# EAGLE board led (EAGLE 8.5.1)
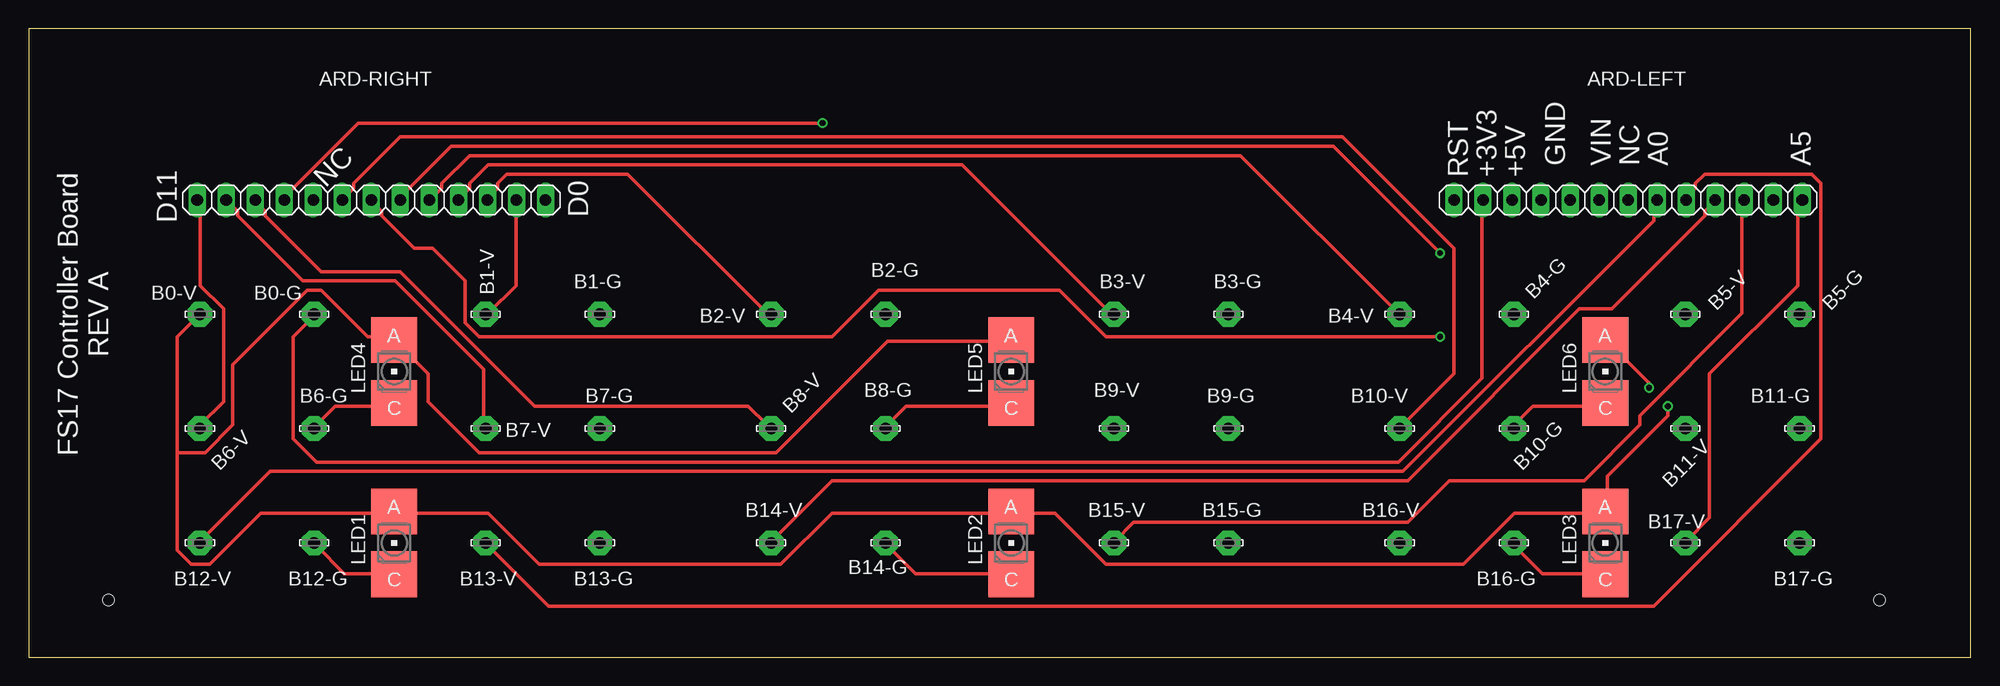
[diagram p0: board, top side]
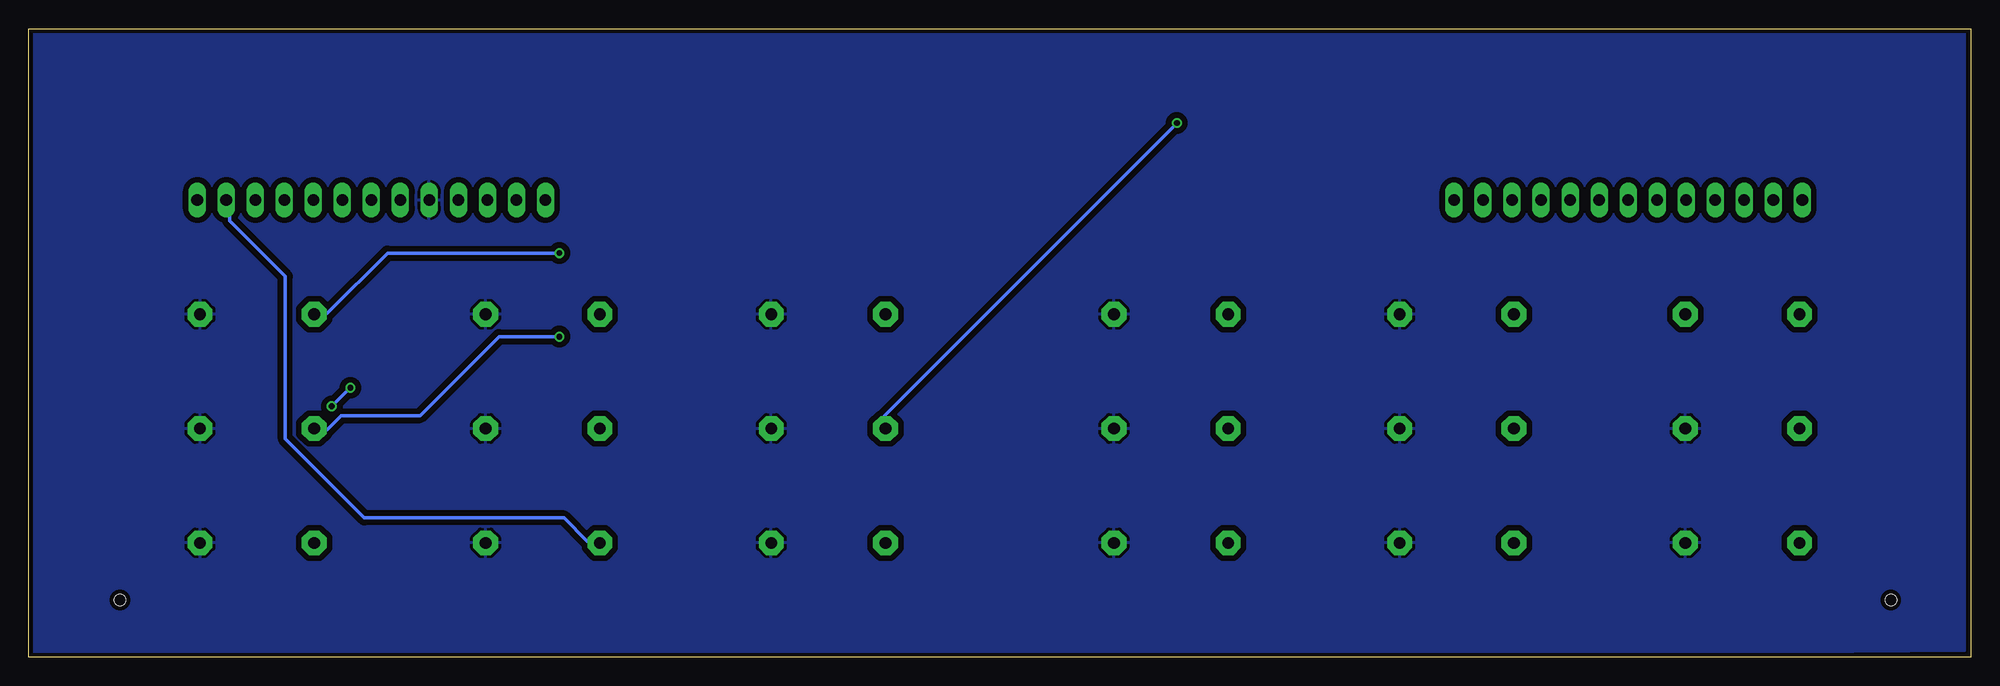
[diagram p1: board, bottom side, seen from below]

Size 170 x 55 mm. Coordinates in mm from the lower left corner, seen from the top.
Outline: 0,0 170,0 170,55 0,55 0,0
Copper layers (1*16): Top 0.0356mm / dielectric 1.5011mm / Bottom 0.0356mm
Design rules "oshpark-2layer *": minimum track width 6mil, minimum drill 0.4mm, track to track 6mil, track to pad 6mil, pad to pad 6mil, via to via 6mil, smd to smd 6mil, copper to edge 15mil, drill to drill 6mil, minimum pad ring 7mil, minimum via ring 7mil, stop-mask expansion 2.5mil, vias tented up to drill 0mil, thermal gap 10mil
Net classes: 0 default: width 0.305 mm, drill 0.508 mm, clearance 0.508 mm
Holes 1 mm at 7,5 162,5

## Footprints (pad centres in the part's own frame; a part is rotated, then mirrored left to right if it is on the bottom)
1X13 = drill 1.016 long: 1 -15.24,0; 2 -12.7,0; 3 -10.16,0; 4 -7.62,0; 5 -5.08,0; 6 -2.54,0; 7 0,0; 8 2.54,0; 9 5.08,0; 10 7.62,0; 11 10.16,0; 12 12.7,0; 13 15.24,0
LSP10 = drill 1.016 pad 2.159 octagon: MP 0,0
P-LCC-2 = smd 4 x 4: A 0,2.75; C 0,-2.75

## Placement (x,y rotation side)
ARD-LEFT  [1X13]  140,40 0 top
ARD-RIGHT  [1X13]  30,40 0 top
B0-G  LSP10  [LSP10]  25,30 0 top
B0-V  LSP10  [LSP10]  15,30 0 top
B1-G  LSP10  [LSP10]  50,30 0 top
B1-V  LSP10  [LSP10]  40,30 0 top
B2-G  LSP10  [LSP10]  75,30 0 top
B2-V  LSP10  [LSP10]  65,30 0 top
B3-G  LSP10  [LSP10]  105,30 0 top
B3-V  LSP10  [LSP10]  95,30 0 top
B4-G  LSP10  [LSP10]  130,30 0 top
B4-V  LSP10  [LSP10]  120,30 0 top
B5-G  LSP10  [LSP10]  155,30 0 top
B5-V  LSP10  [LSP10]  145,30 0 top
B6-G  LSP10  [LSP10]  25,20 0 top
B6-V  LSP10  [LSP10]  15,20 0 top
B7-G  LSP10  [LSP10]  50,20 0 top
B7-V  LSP10  [LSP10]  40,20 0 top
B8-G  LSP10  [LSP10]  75,20 0 top
B8-V  LSP10  [LSP10]  65,20 0 top
B9-G  LSP10  [LSP10]  105,20 0 top
B9-V  LSP10  [LSP10]  95,20 0 top
B10-G  LSP10  [LSP10]  130,20 0 top
B10-V  LSP10  [LSP10]  120,20 0 top
B11-G  LSP10  [LSP10]  155,20 0 top
B11-V  LSP10  [LSP10]  145,20 0 top
B12-G  LSP10  [LSP10]  25,10 0 top
B12-V  LSP10  [LSP10]  15,10 0 top
B13-G  LSP10  [LSP10]  50,10 0 top
B13-V  LSP10  [LSP10]  40,10 0 top
B14-G  LSP10  [LSP10]  75,10 0 top
B14-V  LSP10  [LSP10]  65,10 0 top
B15-G  LSP10  [LSP10]  105,10 0 top
B15-V  LSP10  [LSP10]  95,10 0 top
B16-G  LSP10  [LSP10]  130,10 0 top
B16-V  LSP10  [LSP10]  120,10 0 top
B17-G  LSP10  [LSP10]  155,10 0 top
B17-V  LSP10  [LSP10]  145,10 0 top
LED1  3528W  [P-LCC-2]  32,10 0 top
LED2  3528W  [P-LCC-2]  86,10 0 top
LED3  3528W  [P-LCC-2]  138,10 0 top
LED4  3528W  [P-LCC-2]  32,25 0 top
LED5  3528W  [P-LCC-2]  86,25 0 top
LED6  3528W  [P-LCC-2]  138,25 0 top

## Library data of the parts
ARD-LEFT ARD-RIGHT = pinhead
B0-G B0-V B1-G B1-V B2-G B2-V B3-G B3-V B4-G B4-V B5-G B5-V B6-G B6-V B7-G B7-V B8-G B8-V B9-G B9-V B10-G B10-V B11-G B11-V B12-G B12-V B13-G B13-V B14-G B14-V B15-G B15-V B16-G B16-V B17-G B17-V = solpad; OC_FARNELL: unknown
LED1-LED6 = led

## Nets
+3V3: ARD-LEFT.2 B0-G.MP
+5V: ARD-LEFT.3
+9V: ARD-LEFT.6
A0: ARD-LEFT.8 B12-V.MP
A1: ARD-LEFT.9 B13-V.MP
A2: ARD-LEFT.10 B14-V.MP
A3: ARD-LEFT.11 B15-V.MP
A4: ARD-LEFT.12 B16-V.MP
A5: ARD-LEFT.13 B17-V.MP
BW0: B0-V.MP LED1.A LED2.A LED3.A LED4.A LED5.A LED6.A
D0: ARD-RIGHT.13
D1: ARD-RIGHT.12 B1-V.MP
D2: ARD-RIGHT.11 B2-V.MP
D3: ARD-RIGHT.10 B3-V.MP
D4: ARD-RIGHT.9 B4-V.MP
D5: ARD-RIGHT.8 B5-V.MP
D6: ARD-RIGHT.7 B11-V.MP
D7: ARD-RIGHT.6 B10-V.MP
D8: ARD-RIGHT.4 B9-V.MP
D9: ARD-RIGHT.3 B8-V.MP
D10: ARD-RIGHT.2 B7-V.MP
D11: ARD-RIGHT.1 B6-V.MP
GND: ARD-LEFT.5 B1-G.MP B2-G.MP B3-G.MP B4-G.MP B5-G.MP B6-G.MP B7-G.MP B8-G.MP B9-G.MP B10-G.MP B11-G.MP B12-G.MP B13-G.MP B14-G.MP B15-G.MP B16-G.MP B17-G.MP LED1.C LED2.C LED3.C LED4.C LED5.C LED6.C
GNDA: ARD-LEFT.4
NCA: ARD-LEFT.7
NCD: ARD-RIGHT.5
RST: ARD-LEFT.1

## Tracks (layer width: path | path; a pad name or v marks a point on that pad's centre or on a via)
+3V3
  Top 0.305: ARD-LEFT.2 127.2,39.83 127.2,24.38 119.89,17.07 25.2,17.07 23.16,19.1 23.16,28.04 24.79,29.67 B0-G.MP
A0
  Top 0.305: ARD-LEFT.8 142.24,39.83 142.24,38.2 120.29,16.26 21.13,16.26 15.04,10.16 B12-V.MP
A1
  Top 0.305: ARD-LEFT.9 145.09,40.23 145.9,41.05 145.9,41.45 146.71,42.27 156.06,42.27 156.87,41.45 156.87,19.1 142.24,4.47 45.52,4.47 40.23,9.75 B13-V.MP
A2
  Top 0.305: ARD-LEFT.10 147.52,39.83 146.71,39.01 146.71,38.61 138.58,30.48 135.74,30.48 120.7,15.44 70.31,15.44 65.02,10.16 B14-V.MP
A3
  Top 0.305: ARD-LEFT.11 149.96,39.83 149.96,30.07 141.02,21.13 141.02,20.32 136.14,15.44 124.36,15.44 120.7,11.79 96.72,11.79 95.1,10.16 B15-V.MP
A4
  Bottom 0.305: ARD-LEFT.12 152.4,39.83 152.4,38.2 147.52,33.33 147.52,19.1 140.61,12.19 123.14,12.19 121.11,10.16 120.29,10.16 B16-V.MP
A5
  Top 0.305: ARD-LEFT.13 154.84,39.83 154.84,32.51 147.12,24.79 147.12,12.19 145.09,10.16 B17-V.MP
BW0  (via drill 0.51)
  Top 0.305: v141.83,23.57 141.83,23.98 138.18,27.64 LED6.A | v143.46,21.95 143.46,21.13 138.18,15.85 138.18,13.01 LED3.A 137.77,12.6 130.05,12.6 125.58,8.13 94.28,8.13 89.81,12.6 86.16,12.6 LED2.A 85.75,12.6 70.31,12.6 65.84,8.13 44.7,8.13 40.23,12.6 32.11,12.6 LED1.A 31.7,12.6 20.32,12.6 15.85,8.13 14.22,8.13 13.01,9.35 13.01,17.88 | 13.01,17.88 13.01,28.04 14.63,29.67 B0-V.MP | 13.01,17.88 15.44,17.88 17.88,20.32 17.88,25.6 24.38,32.11 25.6,32.11 29.67,28.04 31.7,28.04 LED4.A 32.11,27.64 34.95,24.79 34.95,22.35 39.42,17.88 65.43,17.88 75.18,27.64 85.75,27.64 LED5.A
  Bottom 0.305: v143.46,21.95 v141.83,23.57
D1
  Top 0.305: ARD-RIGHT.12 42.67,39.83 42.67,32.51 40.23,30.07 B1-V.MP
D2
  Top 0.305: ARD-RIGHT.11 40.23,40.23 41.05,41.05 41.05,41.45 41.86,42.27 52.43,42.27 64.62,30.07 B2-V.MP
D3
  Top 0.305: ARD-RIGHT.10 37.8,40.23 38.61,41.05 38.61,41.45 40.23,43.08 81.69,43.08 94.69,30.07 B3-V.MP
D4
  Top 0.305: ARD-RIGHT.9 35.36,40.23 36.17,41.05 36.17,41.45 38.61,43.89 106.07,43.89 119.89,30.07 B4-V.MP
D5  (via drill 0.51)
  Top 0.305: v123.55,35.36 114.2,44.7 36.98,44.7 32.92,40.64 32.92,40.23 ARD-RIGHT.8
  Bottom 0.305: v123.55,35.36 138.58,35.36 143.87,30.07 144.68,30.07 B5-V.MP
D6  (via drill 0.51)
  Top 0.305: v123.55,28.04 94.28,28.04 90.22,32.11 74.37,32.11 70.31,28.04 39.42,28.04 38.2,29.26 38.2,32.92 35.36,35.76 33.73,35.76 30.89,38.61 30.89,39.01 30.07,39.83 ARD-RIGHT.7
  Bottom 0.305: v123.55,28.04 128.83,28.04 135.74,21.13 142.65,21.13 143.87,19.91 144.68,19.91 B11-V.MP
D7
  Top 0.305: ARD-RIGHT.6 27.64,40.23 28.45,41.05 28.45,41.45 32.51,45.52 115.01,45.52 124.77,35.76 124.77,24.79 120.29,20.32 B10-V.MP
D8  (via drill 0.51)
  Top 0.305: v69.49,46.74 28.85,46.74 22.76,40.64 22.76,40.23 ARD-RIGHT.4
  Bottom 0.305: v69.49,46.74 95.1,21.13 95.1,20.32 B9-V.MP
D9
  Top 0.305: ARD-RIGHT.3 19.91,39.83 20.73,39.01 20.73,38.61 25.6,33.73 32.51,33.73 44.3,21.95 62.99,21.95 64.62,20.32 B8-V.MP
D10
  Top 0.305: ARD-RIGHT.2 17.48,39.83 18.29,39.01 18.29,38.61 23.98,32.92 32.11,32.92 39.83,25.2 39.83,20.32 B7-V.MP
D11
  Top 0.305: ARD-RIGHT.1 15.04,39.83 15.04,32.51 17.07,30.48 17.07,22.35 15.04,20.32 B6-V.MP
GND
  Top 0.305: LED1.C 31.7,7.32 27.64,7.32 25.2,9.75 B12-G.MP | LED4.C 31.7,21.95 26.82,21.95 25.2,20.32 B6-G.MP | LED2.C 85.75,7.32 77.62,7.32 75.18,9.75 B14-G.MP | LED5.C 85.75,21.95 76.81,21.95 75.18,20.32 B8-G.MP | LED3.C 137.77,7.32 132.49,7.32 130.05,9.75 B16-G.MP | LED6.C 137.77,21.95 131.67,21.95 130.05,20.32 B10-G.MP
  pour Bottom: 0.5,56 0.5,0.5 171,-1 171,56

## Text on the board
tNames: GND | VIN | NC | A0 | A5 | RST | +3V3 | +5V | NC | D11 | D0 | FS17 Controller Board / REV A